# Altium PCB MainBoard.PcbDoc
Units mm, origin at the board's own origin, x right, y up, seen from the top; angles counter-clockwise.
Board outline 28.28 x 23.5 mm, 2 copper layers (Top1, Bottom4), stack 1.18 mm thick; 34 components, 52 nets, 214 pads, 122 vias.
Unrouted connection lines stored in the file: 28.
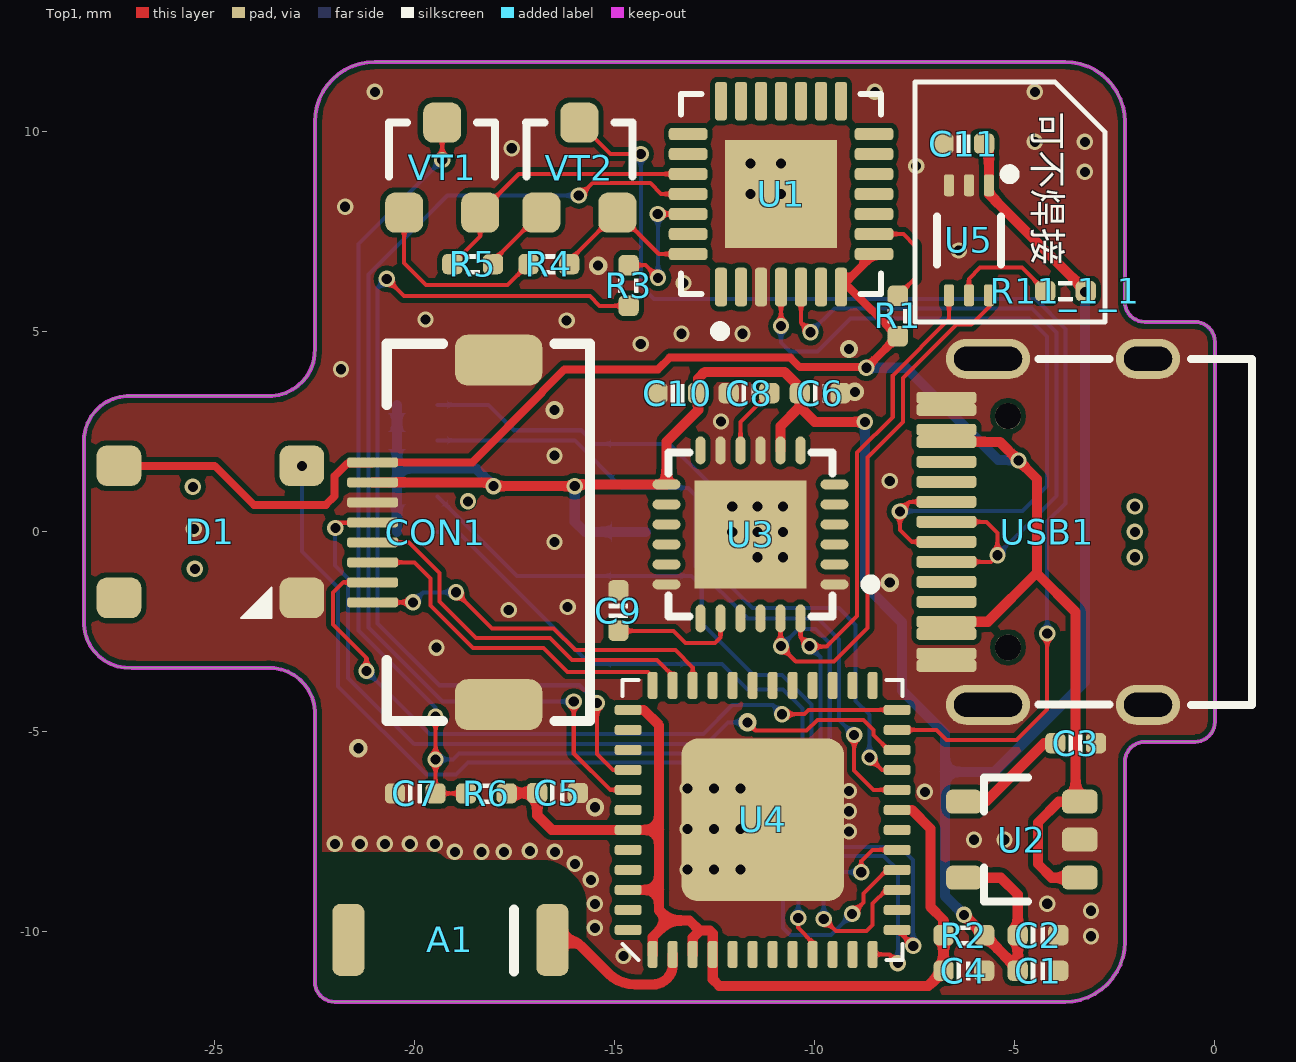
[diagram p0: Top1 view]
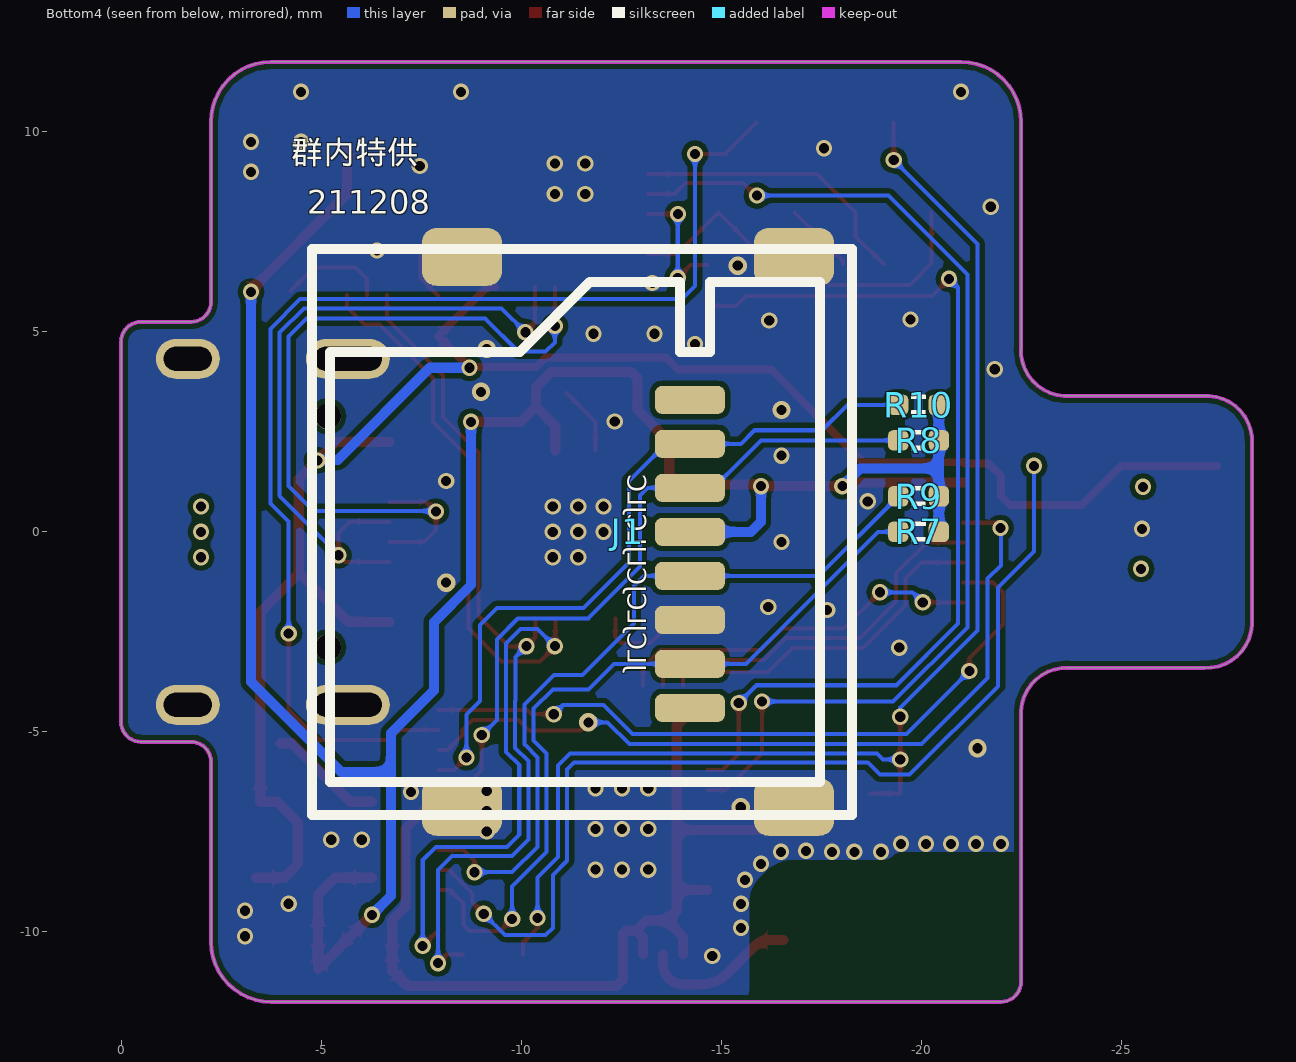
[diagram p1: Bottom4 view, seen from below]
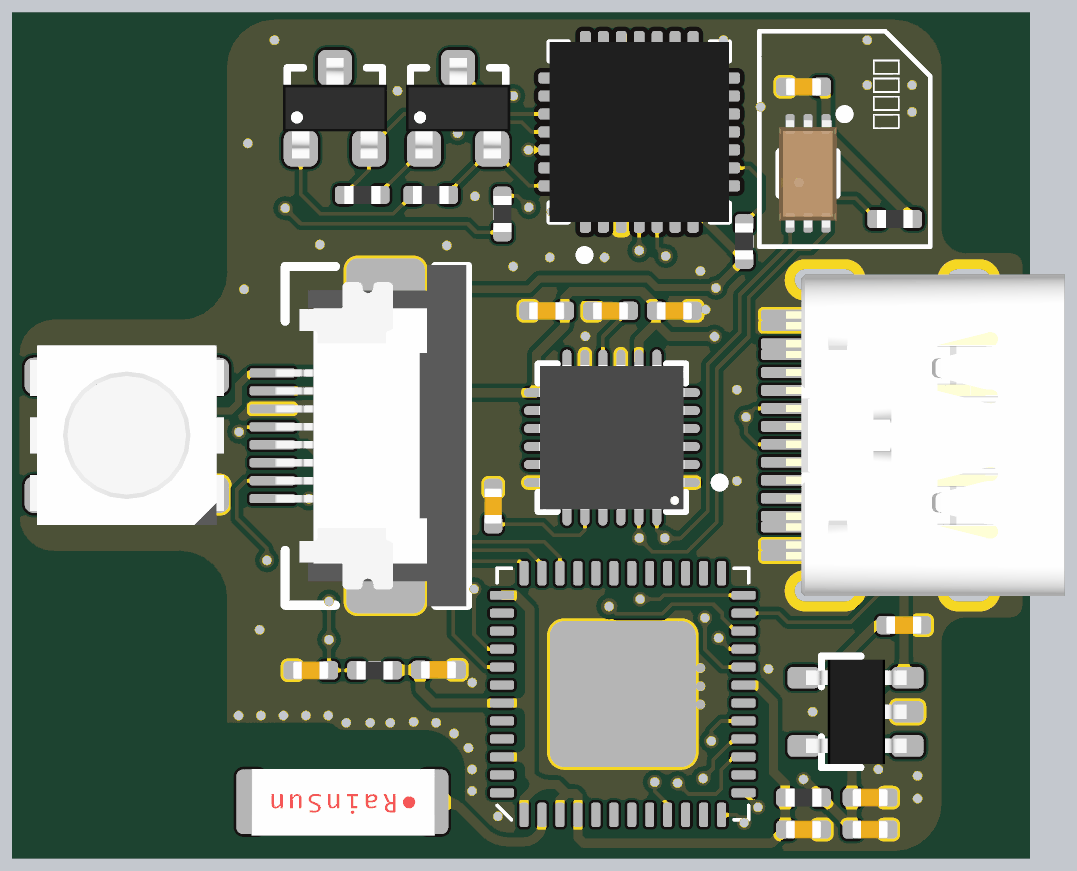
[diagram p2: 3D render of the assembled board from above, using the file's embedded part models]
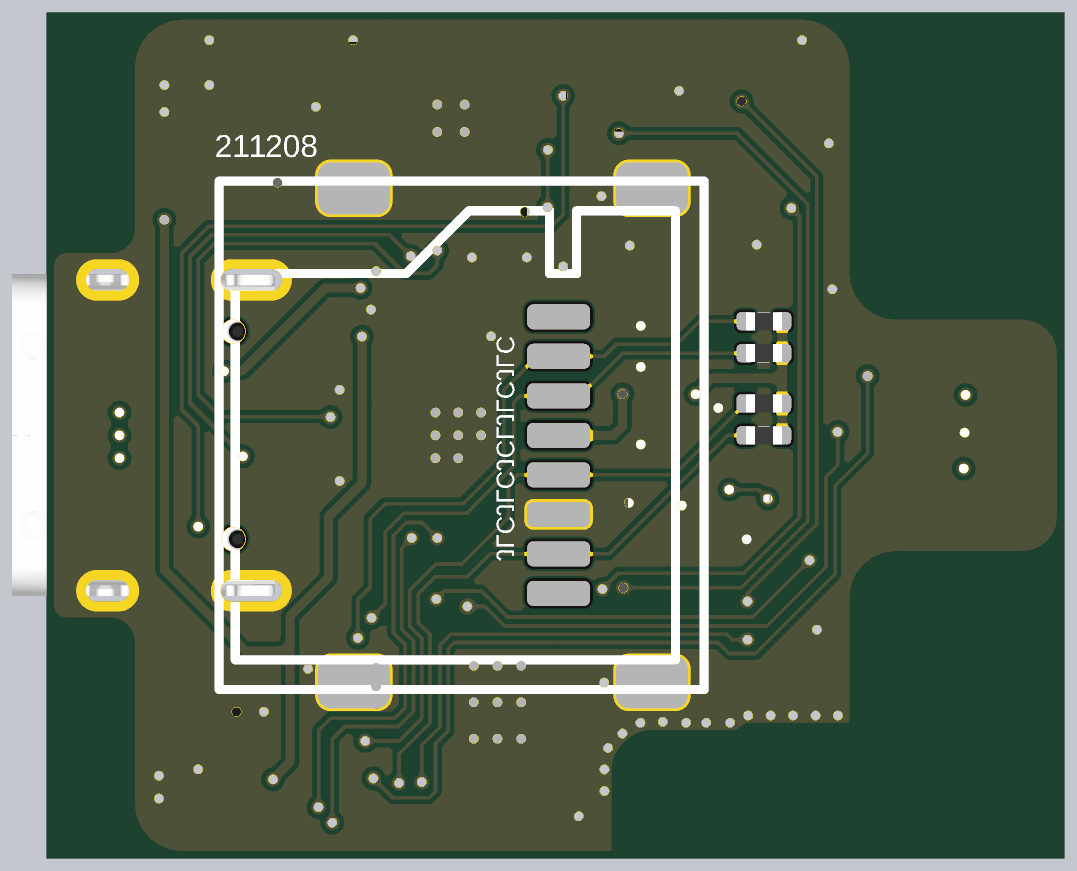
[diagram p3: 3D render of the assembled board from below, using the file's embedded part models]

## Layer stack, top to bottom
Top Solder: solder mask 0.01, Solder Resist, Dk 3.5
Top1: signal copper 0.04
Dielectric 2: core 1.1, PP-006, Dk 4.2
Bottom4: signal copper 0.04
Bottom Solder: solder mask 0.01, Solder Resist, Dk 3.5

## Board outline
-23.7,-3.4 cw(c-23.638,-4.538) -22.5,-4.475 -22.5,-11.25 ccw(c-22,-11.25) -22,-11.75 -3.75,-11.75 ccw(c-3.75,-10.25) -2.25,-10.25 -2.25,-5.75 cw(c-1.75,-5.75) -1.75,-5.25 -0.5,-5.25 ccw(c-0.5,-4.75) 0,-4.75 0,4.75 ccw(c-0.5,4.75) -0.5,5.25 -1.75,5.25 cw(c-1.75,5.75) -2.25,5.75 -2.25,10.25 ccw(c-3.75,10.25) -3.75,11.75 -21,11.75 ccw(c-21,10.25) -22.5,10.25 -22.5,4.625 -22.5,4.6 cw(c-23.637,4.538) -23.575,3.4 -27.2,3.4 ccw(c-27.137,2.262) -28.275,2.2 -28.275,-2.325 ccw(c-27.137,-2.262) -27.075,-3.4

## Design rules (kind name [scope] priority, off if disabled: settings)
Clearance [All] p1: gap=0.127 ignorepadtopadclearanceinfootprint=FALSE
ComponentClearance [All] p1: gap=0 collisioncheckmode=3 verticalgap=0 showdistances=FALSE
DiffPairsRouting [All] p1: maxlimit=0.229 minlimit=0.229 mostfreqgap=0.229 toplayer_minwidth=0.102 toplayer_maxwidth=0.102 toplayer_prefwidth=0.102 bottomlayer_minwidth=0.102 bottomlayer_maxwidth=0.102 bottomlayer_prefwidth=0.102 maxuncoupledlength=12.7
FanoutControl Fanout_BGA [All] p1: bgadir=Out bgaviamode=Centered fanoutstyle=Auto fanoutdirection=Alternating viagrid=0.025 // Fanout_BGA (Default Rule)
HoleSize [All] p1: absolutevalues=TRUE maxlimit=254 minlimit=0.203 maxpercent=80.000 minpercent=20.000
MinimumSolderMaskSliver [All] p1 off: minsoldermaskwidth=0.051
PlaneClearance [All] p1: clearance=0.203
PlaneConnect [All] p1: planeconnectstyle=Direct reliefexpansion=0.508 reliefentries=4 reliefconductorwidth=0.254 reliefairgap=0.254
PolygonConnect [All] p1: connectstyle=Direct reliefconductorwidth=0.254 reliefentries=4 polygonreliefangle="90 Angle" airgapwidth=0.254
RoutingVias [All] p1: holewidth=0.203 width=0.406 viastyle="Through Hole" minholewidth=0.152 minwidth=0.305 maxholewidth=0.711 maxwidth=1.27
SilkToBoardRegionClearance [All] p1 off:
SilkToSilkClearance [All] p1: silktosilkclearance=0
SilkToSolderMaskClearance [IsPad] p1: minsilkscreentomaskgap=0 clearancetoexposedcopper=TRUE
SolderMaskExpansion [All] p1: expansion=0.076 istentingtop=FALSE
Width [All] p1: maxlimit=254 minlimit=0.102 preferedwidth=0.102
20 further rules are at their usual default settings.

## Classes and differential pairs
component class Main: A1 C5 C6 C7 C8 C9 C10 CON1 J1 R1 R3 R4 R5 R6 R7 R8 R9 R10 U1 U3 U4 USB1 VT1 VT2

## Components (designator, comment, footprint, x,y, rotation, side; value= is the part's Value field where it differs from the comment)
A1 "AN2051" ANT-Rainsun-AN5120 -19.1,-10.2 r180 top
C1 "0.1uF" CAP_0402 -4.42,-10.973 r180 top value=0.1u
C2 "10uF" CAP_0402 -4.42,-10.084 r180 top value=0.1u
C3 "10nF" CAP_0402 -3.48,-5.283 r180 top value=0.1u
C4 "10uF" CAP_0402 -6.274,-10.973 r180 top value=0.1u
C5 "0.1uF" CAP_0402 -16.434,-6.528 r180 top value=0.1u
C6 "10nF" CAP_0402 -9.868,3.467 r0 top value=0.1u
C7 "10uF" CAP_0402 -19.99,-6.54 r180 top value=0.1u
C8 "0.1uF" CAP_0402 -11.646,3.467 r180 top value=0.1u
C9 "2.2nF" CAP_0402 -14.91,-1.968 r270 top value=0.1u
C10 "0.1uF" CAP_0402 -13.424,3.467 r0 top value=0.1u
C11 "0.1uF" CAP_0402 -6.274,9.703 r180 top value=0.1u
CON1 "FFC_0.5_8" FFC_0.5_8 -18.796,-0.013 r90 top
D1 "WS2812B" LED_5050_WS2812B -25.111,0.001 r0 top
J1 "TF-Socket" TF_F -14.224,0 r90 bottom locked
R1 "10K" RES_0402 -7.925,5.397 r90 top value=22R
R2 "0R" RES_0402 -6.274,-10.084 r180 top value=22R
R3 "200R" RES_0402 -14.656,6.159 r90 top value=22R
R4 "12K" RES_0402 -16.65,6.693 r180 top value=22R
R5 "12K" RES_0402 -18.555,6.693 r0 top value=22R
R6 "10K" RES_0402 -18.212,-6.54 r180 top value=22R
R7 "10K" RES_0402 -19.939,0 r0 bottom value=22R
R8 "10K" RES_0402 -19.939,2.286 r0 bottom value=22R
R9 "10K" RES_0402 -19.939,0.889 r0 bottom value=22R
R10 "10K" RES_0402 -19.939,3.175 r0 bottom value=22R
R11_1_1 "10K" RES_0402 -3.734,6.02 r0 top value=22R (schematic designator R11)
U1 "CP2102" QFN-28 -10.846,8.445 r90 top value=Value
U2 "ME6211C33 3V3" SOT23-5 -4.877,-7.696 r180 top
U3 "MPU6050" QFN-24 -11.608,-0.064 r180 top
U4 "ESP32_SIP" QFN-48_7X7 -11.303,-7.201 r90 top locked
U5 "BH1750FVI-TR" BH1750FVI -6.147,7.29 r270 top
USB1 "Type-C 16P" Type-C-TOP -4.191,0 r0 top
VT1 "S8050" SMT_TRIODE_NPN -19.317,9.106 r0 top
VT2 "S8050" SMT_TRIODE_NPN -15.888,9.106 r0 top

## Footprints (in the part's own frame and the unit in brackets; to place one, negate y for a bottom-side part, rotate by r counter-clockwise, add the part's x,y. Pads: shape width x height; smd on the part's side, far side on the other; paste and mask are expansions set on the pad)
ANT-Rainsun-AN5120 [mm] "选择焊盘"
  rrect50% 0.8x1.8 smd: 1(-2.54,0) ""(2.563,0)
  silkscreen extent -1.57,-0.76 -1.57,0.79, body extent -2.57,-0.91 2.54,0.94, height 1.32
BH1750FVI [mm]
  rrect50% 0.55x0.25 smd paste+0 mask+0: 1(-1.375,0.5) 2(-1.375,0) 3(-1.375,-0.5) 4(1.375,-0.5) 5(1.375,0) 6(1.375,0.5)
  silkscreen extent -1.78,-0.8 0.6,1.14, body extent -1.49,-0.81 1.51,0.79, height 0.77
CAP_0402 [mil]
  rrect50% 20x20 smd: 1(-20,0) 2(20,0)
  silkscreen extent -7,-9 7,9, body extent -20,-10 20,10, height 20
FFC_0.5_8 [mil]
  rrect50% 50x86 smd: 0(-169.5,-35) 0(169.5,-35)
  rrect50% 10x50 smd: 1(-68.9,89) 2(-49.21,89) 3(-29.53,89) 4(-9.84,89) 5(9.84,89) 6(29.53,89) 7(49.21,89) 8(68.9,89)
  silkscreen extent -186,-125 186,75, body extent -187,-124 187,87, height 82
LED_5050_WS2812B [mil]
  rrect50% 44x40 smd: 1(-90,65) 2(-90,-65) 3(90,-65) 4(90,65)
  silkscreen extent 30,-85 60,-55, body extent -106,-98 106,98, height 69
QFN-24 [mm] "QFN, 24-Leads, Body 4.1x4.1mm (max), Pitch 0.50mm, IPC Low Density"
  oval 0.7x0.25 smd: 1(-2.1,1.25) 2(-2.1,0.75) 3(-2.1,0.25) 4(-2.1,-0.25) 5(-2.1,-0.75) 6(-2.1,-1.25) 13(2.1,-1.25) 14(2.1,-0.75) 15(2.1,-0.25) 16(2.1,0.25) 17(2.1,0.75) 18(2.1,1.25)
  oval 0.25x0.7 smd: 7(-1.25,-2.1) 8(-0.75,-2.1) 9(-0.25,-2.1) 10(0.25,-2.1) 11(0.75,-2.1) 12(1.25,-2.1) 19(1.25,2.1) 20(0.75,2.1) 21(0.25,2.1) 22(-0.25,2.1) 23(-0.75,2.1) 24(-1.25,2.1)
  rect 2.8x2.7 smd: ""(0,0)
  silkscreen extent -3.13,-2.05 2.05,2.05, body extent -2.02,-2.02 2.02,2.02, height 0.95
QFN-28 [mil]
  rrect50% 38x12 smd mask+5: 1(-91.5,59.06) 2(-91.5,39.37) 3(-91.5,19.68) 4(-91.5,0) 5(-91.5,-19.69) 6(-91.5,-39.37) 7(-91.5,-59.06) 15(91.5,-59.06) 16(91.5,-39.37) 17(91.5,-19.69) 18(91.5,0) 19(91.5,19.68) 20(91.5,39.37) 21(91.5,59.06)
  rrect50% 12x38 smd mask+5: 8(-59.06,-91.5) 9(-39.37,-91.5) 10(-19.68,-91.5) 11(0,-91.5) 12(19.69,-91.5) 13(39.37,-91.5) 14(59.06,-91.5) 22(59.06,91.5) 23(39.37,91.5) 24(19.69,91.5) 25(0,91.5) 26(-19.68,91.5) 27(-39.37,91.5) 28(-59.06,91.5)
  rect 106.3x110.24 smd: 29(0,0)
  silkscreen extent -140,-98 98,98, body extent -98,-98 98,98, height 35
QFN-48_7X7 [mm]
  rrect20% 4.064x4.064 smd: 0(0,0)
  rrect50% 0.675x0.25 smd: 1(-3.363,2.75) 2(-3.363,2.25) 3(-3.363,1.75) 4(-3.363,1.25) 5(-3.363,0.75) 6(-3.363,0.25) 7(-3.363,-0.25) 8(-3.363,-0.75) 9(-3.363,-1.25) 10(-3.363,-1.75) 11(-3.363,-2.25) 12(-3.363,-2.75) 25(3.363,-2.75) 26(3.363,-2.25) 27(3.363,-1.75) 28(3.363,-1.25) 29(3.363,-0.75) 30(3.363,-0.25) 31(3.363,0.25) 32(3.363,0.75) 33(3.363,1.25) 34(3.363,1.75) 35(3.363,2.25) 36(3.363,2.75)
  rrect50% 0.25x0.675 smd: 13(-2.75,-3.363) 14(-2.25,-3.363) 15(-1.75,-3.363) 16(-1.25,-3.363) 17(-0.75,-3.363) 18(-0.25,-3.363) 19(0.25,-3.363) 20(0.75,-3.363) 21(1.25,-3.363) 22(1.75,-3.363) 23(2.25,-3.363) 24(2.75,-3.363) 37(2.75,3.363) 38(2.25,3.363) 39(1.75,3.363) 40(1.25,3.363) 41(0.75,3.363) 42(0.25,3.363) 43(-0.25,3.363) 44(-0.75,3.363) 45(-1.25,3.363) 46(-1.75,3.363) 47(-2.25,3.363) 48(-2.75,3.363)
  silkscreen extent -3.5,-3.5 3.5,3.5, body extent -3.5,-3.5 3.5,3.5, height 1
RES_0402 [mil]
  rrect50% 20x20 smd: 1(-20,0) 2(20,0)
  silkscreen extent -7,-10 7,10, body extent -20,-10 20,10, height 14
SMT_TRIODE_NPN [mm] "Surface mount NPN transistor, package SOT-23"
  rrect50% 0.95x1 smd: 1(-0.95,-1.125) 2(0.95,-1.125) 3(0,1.125)
  silkscreen extent -1.33,-0.22 1.32,1.13, body extent -1.45,-1.4 1.45,1.4, height 1.3
SOT23-5 [mm] "SOT23, 3-Leads, Body 3.1x3.0mm (max), Pitch 0.95mm, IPC Medium Density"
  rrect50% 0.889x0.6 smd: 1(-1.5,0.95) 2(-1.5,0) 3(-1.5,-0.95) 4(1.396,-0.95) 5(1.396,0.95)
  silkscreen extent -0.2,-1.55 0.9,1.55, body extent -1.48,-1.45 1.32,1.45, height 1.2
TF_F [mm]
  rrect50% 1.45x2 smd: 0(-6.875,-2.6) 0(-6.875,5.7) 0(6.875,-2.6) 0(6.875,5.7)
  rrect50% 0.7x1.75 smd: 1(3.3,0) 2(2.2,0) 3(1.1,0) 4(0,0) 5(-1.1,0) 6(-2.2,0) 7(-3.3,0) 8(-4.4,0)
  silkscreen extent -7.08,-4.05 7.08,9.45
Type-C-TOP [mm]
  round 0.65 hole 0.65: 0(-0.98,-2.89) 0(-0.98,2.89)
  oval 1.6x1 hole 0.6 slot 1.2 at 0 deg: 1(2.52,4.325) 2(2.52,-4.325)
  oval 2.1x1 hole 0.6 slot 1.7 at 0 deg: 3(-1.48,-4.325) 4(-1.48,4.325)
  rrect50% 1.5x0.3 smd: A1(-2.52,-3.35) A4(-2.52,-2.55) A5(-2.52,-1.25) A6(-2.52,-0.25) A7(-2.52,0.25) A8(-2.52,1.25) A9(-2.52,2.55) A12(-2.52,3.35) B1(-2.52,3.05) B4(-2.52,2.25) B5(-2.52,1.75) B6(-2.52,0.75) B7(-2.52,-0.75) B8(-2.52,-1.75) B9(-2.52,-2.25) B12(-2.52,-3.05)
  silkscreen extent -0.22,-4.33 5.12,4.33, body extent -2.57,-4.48 5.18,4.48, height 3.26

## Part data
A1: library part ANT-Rainsun-AP5120
C1 C2 C3 C4 C5 C6 C7 C8 C9 C10 C11: library part 电容-0402, "Capacitor"
CON1: "FFC下接", System=Connector
J1: "翻盖式", Package=None, Availability=Unavailable, MF="Amphenol Commercial Products", MP=1140084168, Price=None, SnapEDA_Link=https://www.snapeda.com/parts/1140084168/Amphenol/view-part/4544529/?ref=snap
R1 R2 R3 R4 R5 R6 R7 R8 R9 R10 R11_1_1: library part 电阻-0402, "Resistor"
U1: "USB转TTL", MFG #1="SILICON LABS", PART DESC="SINGLE-CHIP USB TO UART BRIDGE, QFN28, RoHS.", PART NUMBER=CP2102, RefDes=RefDes, Type=DEV
U2: library part LP2992, "LDO"
U3: "六轴传感器"
U4: library part ESP32-PICO
USB1: library part USB-Type-C-TOP
VT1 VT2: library part SMT_TRIODE_NPN, "Surface mount NPN transistor, package SOT-23"

## Via types
v1: diameter 0.406, hole 0.254, Top1 to Bottom4, tented both sides, 114 vias
v2: diameter 0.457, hole 0.254, Top1 to Bottom4, tented both sides, 8 vias

## Nets (pads, with @x,y where several pads share a name; then routed paths per layer and width w, separated by ;. In a path a pad name is that pad's centre, name@x,y a point inside that pad or via, vN(x,y) a via of type N, cw(c..) or ccw(c..) an arc to the next point about the centre after c; other vN are vias at no path point)
3V3: C1.2 C2.2 C6.1 C10.2 C11.1 CON1.7 J1.4 R2.1 R7.1 R8.1 R9.1 R10.1 R11_1_1.2 U2.5 U3.8 U3.13 U5.1 | length 62.6
  Top1 w0.254: CON1.7 -18.128,1.237 v1(-18.034,1.143) ; v1@-17.987,1.19 -17.94,1.143 v1(-16.002,1.143) ; v1@-16.002,1.187 U3.13 -13.708,2.256 -12.916,3.048 C10.2 -12.916,3.834 -12.75,4 -10.761,4 -10.376,3.615 C6.1 -10.376,3.124 ; U3.8 -10.858,2.642 -10.376,3.124 ; v1(-8.75,2.75) -10.002,2.75 -10.376,3.124 ; v1(-6.274,-9.576) R2.1 -4.928,-10.922 C2.2 -4.928,-9.068 -5.349,-8.646 U2.5 ; C11.1@-5.647,9.584 U5.1 -5.647,8.441 R11_1_1.2
  Bottom4 w0.254: R7.1 R9.1 -20.447,1.587 ; R10.1 R8.1 -20.447,1.587 ; v1(-18.034,1.143) -18.479,1.587 -20.447,1.587 ; v1(-16.002,1.143) -16.002,0.254 -15.748,0 J1.4 ; v1(-8.75,2.75) -8.75,-1.33 -7.823,-2.257 -7.823,-3.962 -6.75,-5.036 -6.75,-6 ; v1(-6.274,-9.576) -6.75,-9.1 -6.75,-6 ; v1(-3.25,6) -3.25,-3.75 -5.5,-6 -6.75,-6
3V3A: C4.2 C5.2 R2.2 R6.1 U4.1 U4.3 U4.4 U4.19 U4.37 U4.43 U4.46 | length 26
  Top1 w0.254: R6.1 -17.691,-6.528 C5.2 -16.942,-7.087 -16.578,-7.451 U4.43 -13.894,-7.451 ; U4.46 -13.894,-8.951 ; U4.37 -14.282,-4.451 -13.894,-4.839 -13.894,-7.451 ; U4.1 -14.053,-10.129 -13.64,-9.716 ; U4.3 -13.053,-10.145 -12.878,-9.97 ; -12.395,-11.354 -7.163,-11.354 C4.2 R2.2 -6.782,-9.703 -7.112,-9.373 -7.112,-7.417 -7.578,-6.951 U4.19 ; -12.395,-11.341 -12.553,-11.183 U4.4 -12.553,-10.04 -12.624,-9.97 -12.878,-9.97 ; -13.894,-8.951 -13.894,-9.461 -13.64,-9.716 ; -13.894,-8.951 -13.894,-7.451 ; -13.64,-9.716 -13.132,-9.716 -12.878,-9.97
BH_SCL: U3.23 U4.13 U5.6 | length 25
  Top1 w0.102: U3.23 v1@-10.858,-2.846 ; v1(-10.846,-2.857) v1@-10.858,-2.846 ; U4.13 v1(-7.541,-10.351) ; U5.6 -5.647,5.647 -5.635,5.635 -6.089,5.182 -6.459,5.182 -7.798,3.842 -7.798,2.743 -8.687,1.854 -8.687,-2.409 -9.516,-3.238 -10.477,-3.238 -10.858,-2.858 v1@-10.858,-2.846
  Bottom4 w0.102: v1(-10.846,-2.857) -10.414,-2.426 -9.988,-2.426 -9.627,-2.787 -9.627,-5.499 -9.957,-5.829 -9.957,-7.569 -9.652,-7.874 -7.874,-7.874 -7.544,-8.204 -7.544,-10.348 v1(-7.541,-10.351)
BH_SDA: U3.24 U4.12 U5.4 | length 22
  Top1 w0.102: U3.24 -10.358,-2.634 v1(-10.135,-2.857) ; v1@-10.135,-2.87 -9.703,-2.87 -8.941,-2.108 -8.941,1.981 -8.052,2.87 -8.052,3.912 -6.647,5.317 U5.4 ; U4.12 -8.144,-10.563 v1(-7.925,-10.782)
  Bottom4 w0.102: v1(-10.135,-2.857) -9.858,-3.134 -9.858,-4.22 -9.855,-4.223 -9.855,-5.404 -10.185,-5.735 -10.185,-7.696 -9.779,-8.103 -8.28,-8.103 -7.925,-8.458 v1(-7.925,-10.782)
CP_Rx: U1.25 U4.41 | length 26.9
  Top1 w0.102: v1(-16.027,-4.242) -16.027,-5.536 -15.113,-6.451 U4.41 ; v1(-15.9,8.407) -15.9,8.369 -15.553,8.717 -14.114,8.717 -13.843,8.445 U1.25
  Bottom4 w0.102: v1(-16.027,-4.242) -19.304,-4.242 -21.158,-2.388 -21.158,6.439 -19.736,7.861 -19.19,8.407 v1(-15.9,8.407)
CP_Tx: R3.1 U4.40 | length 23.6
  Top1 w0.102: v1(-20.701,6.325) -20.269,5.893 -15.621,5.893 -15.38,5.651 R3.1 ; v1(-15.443,-4.28) -15.443,-5.55 -15.042,-5.951 U4.40
  Bottom4 w0.102: v1(-20.701,6.325) -20.93,6.096 -20.93,-2.293 -19.387,-3.835 -15.888,-3.835 v1(-15.443,-4.28)
DC: CON1.5 U4.22 | length 20.1
  Top1 w0.102: v1(-21.987,0.096) -21.987,0.16 -21.919,0.227 -21.066,0.227 CON1.5 ; v2(-11.684,-4.763) -11.481,-4.966 -10.204,-4.966 -9.938,-4.699 -8.788,-4.699 -8.534,-4.953 -8.534,-5.08 -8.163,-5.451 U4.22
  Bottom4 w0.102: v1(-21.987,0.096) -21.996,0.086 -21.996,-0.838 -21.666,-1.168 -21.666,-3.658 -20.015,-5.309 -12.713,-5.309 -12.167,-4.763 v2(-11.684,-4.763)
DTR: R4.1 U1.28 VT2.2 | length 4
  Top1 w0.102: R4.1 -16.142,6.777 VT2.2 -13.902,6.946 U1.28
EN: C7.1 R6.2 U4.9 VT1.3 | length 33
  Top1 w0.102: v1(-19.482,-4.623) C7.1 R6.2 ; v1(-19.317,9.296) VT1.3 ; v1(-10.414,-9.652) -10.414,-9.906 -10.053,-10.267 U4.9
  Bottom4 w0.102: v1(-19.482,-5.69) -19.05,-5.69 -18.898,-5.537 -11.227,-5.537 -10.922,-5.842 -10.922,-8.128 -10.414,-8.636 v1(-10.414,-9.652) ; v1(-19.482,-4.623) -19.482,-4.394 -21.412,-2.464 -21.412,7.201 v1(-19.317,9.296)
FLASH_CLK: U4.31
FLASH_CS: U4.25
FLASH_SD0: U4.27
FLASH_SD1: U4.33
FLASH_SD2: U4.30
FLASH_SD3: U4.32
GND: C1.1 C2.1 C3.1 C4.1 C5.1 C6.2 C7.2 C8.2 C9.1 C10.1 C11.2 CON1.0 CON1.6 D1.3 J1.0 J1.6 U1.3 U1.29 U2.2 U3. U3.1 U3.9 U3.11 U3.18 U4.0 U5.2 U5.3 USB1.1 USB1.2 USB1.3 USB1.4 USB1.A1 USB1.A12 USB1.B1 USB1.B12 | length 0.1
  Top1 w0.203: v1@-18.771,0.737 -18.747,0.762 v1(-18.669,0.762)
  other v1: -14.783,-10.604 -3.099,-10.109 -15.5,-9.9 -3.099,-9.474 -15.5,-9.3 -4.191,-9.296 -15.6,-8.7 -13.183,-8.445 -12.522,-8.445 -11.862,-8.445 -16,-8.3 -19,-8 -18.333,-8 -17.775,-8 -16.5,-8 -17.125,-7.975 -22,-7.8 -21.375,-7.8 -20.75,-7.8 -20.125,-7.8 -19.5,-7.8 -6.02,-7.696 -5.258,-7.696 -9.144,-7.493 -13.183,-7.429 -12.522,-7.429 -11.862,-7.429 -9.144,-6.985 -7.25,-6.5 -9.144,-6.477 -13.183,-6.413 -12.522,-6.413 -11.862,-6.413 -19.456,-2.896 -17.653,-1.956 -16.18,-1.88 -11.43,-0.635 -10.795,-0.635 -16.51,-0.254 -12.065,0 -11.43,0 -10.795,0 -25.525,0.075 -12.065,0.635 -11.43,0.635 -10.795,0.635 -8.128,1.27 -16.51,1.905 -12.344,2.756 -21.844,4.064 -14.351,4.699 -13.335,4.953 -11.811,4.953 -16.205,5.283 -19.736,5.309 -13.284,6.223 -6.401,7.036 -21.742,8.128 -11.608,8.445 -10.846,8.445 -3.25,9 -7.468,9.144 -11.608,9.207 -10.846,9.207 -17.577,9.588 -4.5,9.75 -3.25,9.75 -21,11 -8.5,11 -4.5,11
  other v2: -15.494,-6.883 -21.412,-5.41 -8.128,-1.27 -16.51,3.048 -9,3.5 -9.144,4.572 -15.418,6.655
GPIO0: U4.23 VT2.3 | length 30.1
  Top1 w0.102: VT2.3 -15.106,9.449 v1(-14.351,9.449) ; U4.23 -6.962,-4.951 -6.706,-5.207 -4.957,-5.207 -4.404,-4.654 -4.191,-4.441 v1(-4.191,-2.54)
  Bottom4 w0.102: v1(-14.351,9.449) -14.351,6.147 -14.021,5.817 -4.477,5.817 -3.734,5.073 -3.734,0.711 -4.191,0.254 v1(-4.191,-2.54)
GPIO4: CON1.2 U4.24 | length 17.8
  Top1 w0.102: v1(-21.209,-3.48) -21.209,-3.15 -22.047,-2.311 -22.047,-1.511 -21.799,-1.263 CON1.2 ; v1(-10.82,-4.559) -10.262,-4.559 -10.153,-4.451 U4.24
  Bottom4 w0.102: v1(-21.209,-3.48) -19.634,-5.055 -12.789,-5.055 -12.065,-4.331 -11.049,-4.331 v1(-10.82,-4.559)
GPIO5: CON1.1 U4.34 | length 9.3
  Top1 w0.102: CON1.1 v1(-20.043,-1.763) ; v1(-18.974,-1.511) -18.066,-2.419 -16.529,-2.419 -15.989,-2.959 -13.487,-2.959 -13.053,-3.394 U4.34
  Bottom4 w0.102: v1(-20.043,-1.763) -19.792,-1.511 v1(-18.974,-1.511)
GPIO9: U4.28
GPIO10: U4.29
GPIO12: U4.18
GPIO13: J1.3 R8.2 U4.20 | length 17.9
  Top1 w0.102: v1(-9.017,-5.08) -9.017,-5.968 -8.534,-6.451 U4.20
  Bottom4 w0.102: R8.2 -16.002,2.286 -14.816,1.1 J1.3 -13.165,1.1 -12.979,0.914 -12.979,-0.864 -11.684,-2.159 -11.684,-2.172 -9.919,-2.172 -9.398,-2.692 -9.398,-4.699 v1(-9.017,-5.08)
GPIO14: J1.5 R9.2 U4.17 | length 18.9
  Top1 w0.102: v1(-8.839,-8.509) -8.839,-8.23 -8.561,-7.951 U4.17
  Bottom4 w0.102: R9.2 -17.442,-1.1 J1.5 -13.081,-1.1 -12.827,-1.354 -12.827,-2.286 -11.532,-3.581 -10.82,-3.581 -10.084,-4.318 -10.084,-5.31 -10.414,-5.64 -10.414,-7.874 -9.779,-8.509 v1(-8.839,-8.509)
GPIO15: J1.2 R10.2 U4.21 | length 18.2
  Top1 w0.102: v1(-8.636,-5.639) -8.324,-5.951 U4.21
  Bottom4 w0.102: R10.2 -18.161,3.175 -17.526,2.54 -15.834,2.54 -15.494,2.2 J1.2 -13.63,2.2 -12.7,1.27 -12.7,-0.762 -11.557,-1.905 -9.398,-1.905 -8.979,-2.324 -8.979,-4.229 -8.636,-4.572 v1(-8.636,-5.639)
GPIO18: CON1.4 U4.35 | length 9.5
  Top1 w0.102: CON1.4 -20.146,-0.263 -19.38,-1.029 -19.38,-1.747 -18.476,-2.651 -16.62,-2.651 -16.071,-3.2 -13.945,-3.2 -13.553,-3.592 U4.35
GPIO19: U4.38
GPIO21: U4.42
GPIO22: U4.39
GPIO23: CON1.3 U4.36 | length 8.8
  Top1 w0.102: CON1.3 -20.008,-0.763 -19.609,-1.162 -19.609,-1.841 -18.548,-2.902 -16.783,-2.902 -16.18,-3.505 -14.173,-3.505 -14.053,-3.625 U4.36
GPIO25: U4.14
GPIO26: J1.7 R7.2 U4.15 | length 19.4
  Top1 w0.102: v1(-9.779,-9.677) -9.474,-9.982 -8.712,-9.982 -8.56,-9.83 -8.56,-9.296 -8.214,-8.951 U4.15
  Bottom4 w0.102: R7.2 -18.923,0 -15.623,-3.3 J1.7 -12.321,-3.3 -11.684,-3.937 -10.795,-3.937 -10.312,-4.42 -10.312,-5.215 -10.643,-5.545 -10.643,-8.001 -9.779,-8.865 v1(-9.779,-9.677)
GPIO27: D1.4 U4.16 | length 25.6
  Top1 w0.102: v1(-9.068,-9.55) -8.788,-9.271 -8.788,-9.042 -8.197,-8.451 U4.16
  Bottom4 w0.102: v1(-22.825,1.65) -22.825,-0.492 -21.92,-1.397 -21.92,-3.861 -19.71,-6.071 -18.974,-6.071 -18.669,-5.766 -11.321,-5.766 -11.151,-5.937 -11.151,-8.223 -10.795,-8.578 -10.795,-9.906 -10.617,-10.084 -9.601,-10.084 v1(-9.068,-9.55)
GPIO34: U4.10
GPIO35: U4.11
GPIO37: U4.6
GPIO38: U4.7
MetR11_1: R11_1_1.1 U5.5 | length 2.7
  Top1 w0.102: U5.5 -6.147,6.325 -5.867,6.604 -4.826,6.604 R11_1_1.1
NetA1_1: A1.1 U4.2 | length 3.9
  Top1 w0.254: A1.1 -16.212,-10.2 cw(c-16.212,-10.712) -15.85,-10.35 -15.156,-11.044 ; -15.156,-11.044 ccw(c-14.5,-10.388) -14.5,-11.316 -14.059,-11.316 ccw(c-14.059,-10.795) -13.691,-11.163 ccw(c-14.023,-10.831) -13.553,-10.831 U4.2
NetC3_2: C3.2 U2.4 | length 2.9
  Top1 w0.254: U2.4 -5.73,-6.746 -4.267,-5.283 C3.2
NetC8_1: C8.1 U3.10 | length 1.7
  Top1 w0.102: U3.10 -11.858,2.747 C8.1
NetC9_2: C9.2 U3.20 | length 3.2
  Top1 w0.102: C9.2 -13.538,-2.476 -13.233,-2.781 -12.497,-2.781 -12.358,-2.642 U3.20
NetR1_2: R1.2 U1.9 | length 2.6
  Top1 w0.102: U1.9 -7.788,7.445 -7.493,7.15 -7.493,6.337 R1.2
NetR3_2: R3.2 U1.26 | length 3.2
  Top1 w0.102: R3.2 -14.237,6.667 v1(-13.919,6.35) ; v1(-13.927,7.946) U1.26
  Bottom4 w0.102: v1(-13.927,7.946) -13.919,7.938 v1(-13.919,6.35)
NetR4_2: R4.2 VT1.1 | length 4.8
  Top1 w0.102: VT1.1 -20.267,6.716 -19.723,6.172 -17.678,6.172 R4.2
NetR5_2: R5.2 VT2.1 | length 1.8
  Top1 w0.102: R5.2 -18.047,6.772 VT2.1
RTS: R5.1 U1.24 VT1.2 | length 7.2
  Top1 w0.102: R5.1 -18.367,7.389 VT1.2 -17.402,8.945 U1.24
SENSOR_VN: U4.8
SENSOR_VP: U4.5
USB-PWR-DM: U1.5 USB1.A7 USB1.B7 | length 17.3
  Top1 w0.102: U1.5 -10.346,5.228 v1(-10.109,4.991) ; USB1.B7 -5.601,-0.75 v1(-5.436,-0.584) -5.436,-0.025 -5.711,0.25 USB1.A7
  Bottom4 w0.102: v1(-10.109,4.991) -9.512,5.588 -4.572,5.588 -3.962,4.978 -3.962,0.902 -4.877,-0.013 v1@-5.436,-0.572
USB-PWR-DP: U1.4 USB1.A6 USB1.B6 | length 19.4
  Top1 w0.102: v1(-10.846,5.143) U1.4 ; USB1.A6 -7.573,-0.25 -7.874,0.051 v1(-7.874,0.508) -7.632,0.75 USB1.B6
  Bottom4 w0.102: v1(-10.846,5.143) -10.846,4.737 -10.617,4.508 -9.931,4.508 -9.106,5.334 -4.641,5.334 -4.191,4.884 -4.191,1.143 -4.814,0.52 v1@-7.874,0.52
VDD_5V: CON1.8 D1.1 R1.1 U1.7 U1.8 U2.1 U2.3 USB1.A4 USB1.A9 USB1.B4 USB1.B9 | length 47.1
  Top1 w0.2: D1.1 -25.003,1.652 -24.026,0.675 -22.225,0.675 -22.004,0.896 -22.004,1.396 -21.69,1.71 -21.084,1.71 CON1.8 ; CON1.8@-21.056,1.75 -20.263,1.737 -18.563,1.737 -16.82,3.48 -16.82,3.5 -16.256,4.064 -13.919,4.064 -13.629,4.354 -10.615,4.354 -10.377,4.116 v1@-8.858,4.116 ; v1(-8.712,4.102) R1.1 -9.157,6.121 U1.7 U1.8
  Top1 w0.254: USB1.B9 -5.679,-2.25 -4.445,-1.016 -4.445,1.321 v1(-4.91,1.785) -5.374,2.25 USB1.B4 ; -4.445,-1.041 -3.48,-2.007 -3.48,-6.746 -3.901,-6.746 -4.42,-7.264 -4.42,-8.306 -4.079,-8.646 U2.1
  Bottom4 w0.254: v1(-8.712,4.102) -7.722,4.102 -5.418,1.798 v1@-4.91,1.798
pads on no net: A1. D1.2 J1.1 J1.8 U1.1 U1.2 U1.6 U1.10 U1.11 U1.12 U1.13 U1.14 U1.15 U1.16 U1.17 U1.18 U1.19 U1.20 U1.21 U1.22 U1.23 U1.27 U3.2 U3.3 U3.4 U3.5 U3.6 U3.7 U3.12 U3.14 U3.15 U3.16 U3.17 U3.19 U3.21 U3.22 U4.26 U4.44 U4.45 U4.47 U4.48 USB1.0 USB1.A5 USB1.A8 USB1.B5 USB1.B8
copper on no net:
  other v1: -25.5,-0.925 -2,-0.635 -2,0 -2,0.635 -25.55,1.125

## Polygon pours and split planes (outlines as drawn)
GND on Top1 "NONET_L02_P-001" (solid, remove dead copper, pour order 34): -30.475,14.15 -30.475,-14.175 -28.8,-15.85 8.45,-15.85 8.45,12.275 4.675,16.05
GND on Top1 "GND_L01_P002" (solid, remove dead copper, pour order 2): -34,-5
GND on Bottom4 "NONET_L02_P-001" (solid, remove dead copper, pour order 35): -30,13.35 -30.325,13.025 -30.325,-13.05 3.45,-13.05 6.175,-10.325 2.175,-6.325 2.175,15.025
no net on Bottom4 "NONET_L02_P-001" (solid, remove dead copper, pour order 27): -30.25,15.7

## Keep-outs
Keep-Out Layer:
  lines w0.1: -21,11.75 ccw(c-21,10.25) -22.5,10.25 -22.5,4.625 -22.5,4.6 cw(c-23.637,4.538) -23.575,3.4 -27.2,3.4 ccw(c-27.137,2.262) -28.275,2.2 -28.275,-2.325 ccw(c-27.137,-2.262) -27.075,-3.4 -23.7,-3.4 cw(c-23.638,-4.538) -22.5,-4.475 -22.5,-11.25 ccw(c-22,-11.25) -22,-11.75 -3.75,-11.75 ; -21,11.75 -21,11.75 ; -21,11.75 -3.75,11.75 cw(c-3.75,10.25) -2.25,10.25 ; -3.75,-11.75 ccw(c-3.75,-10.25) -2.25,-10.25 -2.25,-5.75 cw(c-1.75,-5.75) -1.75,-5.25 ; -3.75,-11.75 -3.75,-11.75 ; -2.25,5.75 ccw(c-1.75,5.75) -1.75,5.25 -0.5,5.25 cw(c-0.5,4.75) 0,4.75 0,-4.75 cw(c-0.5,-4.75) -0.5,-5.25 -1.75,-5.25 ; -2.25,5.75 -2.25,10.25 ; -2.25,5.75 -2.25,5.75 ; -2.25,10.25 -2.25,10.25 ; -1.75,-5.25 -1.75,-5.25

## Other copper
Top1:
  pour cut-out: -22.5,-11.75 -22.5,-8 -19.541,-8 cw(c-19.541,-8.341) -19.3,-8.1 ccw(c-19.059,-7.859) -19.059,-8.2 -16.824,-8.2 cw(c-16.824,-9.224) -16.1,-8.5 -15.983,-8.617 cw(c-16.666,-9.3) -15.7,-9.3 -15.7,-11.459 ccw(c-15.359,-11.459) -15.6,-11.7
Bottom4:
  pour cut-out: -22.5,-11.75 -22.5,-8 -19.541,-8 cw(c-19.541,-8.341) -19.3,-8.1 ccw(c-19.059,-7.859) -19.059,-8.2 -16.824,-8.2 cw(c-16.824,-9.224) -16.1,-8.5 -15.983,-8.617 cw(c-16.666,-9.3) -15.7,-9.3 -15.7,-11.459 ccw(c-15.359,-11.459) -15.6,-11.7
  pour cut-out: -9,11.75

## Silkscreen, mask and mechanical layers (free items; w line width, h text height)
Top Overlay:
  lines w0.128: -7.5,5.25 -7.5,10.5 -7.5,11.25 -4,11.25 -2.75,10 -2.75,5.25 -7.5,5.25
  text "可不焊接" at -4.75,10.5 h1.2 r270
Bottom Overlay:
  text "群内特供" at -4.25,9 h1
  text "211208" at -4.65,7.75 h1
  text "JLCJLCJCLJLCJLC" at -12.5,-3.5 h0.8 r90
Mechanical 1:
  lines w0.25: -28.275,-2.325 ccw(c-27.137,-2.262) -27.075,-3.4 ; -28.275,2.2 cw(c-27.137,2.262) -27.2,3.4 ; -23.7,-3.4 cw(c-23.638,-4.538) -22.5,-4.475 ; -23.575,3.4 ccw(c-23.637,4.538) -22.5,4.6
  lines w0.254: -28.275,-2.325 -28.275,2.2 ; -27.225,3.4 -23.575,3.4 ; -27.075,-3.4 -23.7,-3.4 ; -22.5,-4.5 -22.5,-11.25 ccw(c-22,-11.25) -22,-11.75 -3.75,-11.75 ccw(c-3.75,-10.25) -2.25,-10.25 -2.25,-5.75 cw(c-1.75,-5.75) -1.75,-5.25 -0.5,-5.25 ccw(c-0.5,-4.75) 0,-4.75 0,4.75 ccw(c-0.5,4.75) -0.5,5.25 -1.75,5.25 cw(c-1.75,5.75) -2.25,5.75 -2.25,10.25 ccw(c-3.75,10.25) -3.75,11.75 -21,11.75 ccw(c-21,10.25) -22.5,10.25 -22.5,4.625